# Altium PCB PCB_Awg.PcbDoc (part 1 of 2)
Units mm, origin at the board's own origin, x right, y up, seen from the top; angles counter-clockwise.
Board outline 100 x 100 mm, 2 copper layers (Top Layer, Bottom Layer); 107 components, 76 nets, 298 pads, 59 vias.
Unrouted connection lines stored in the file: 35.
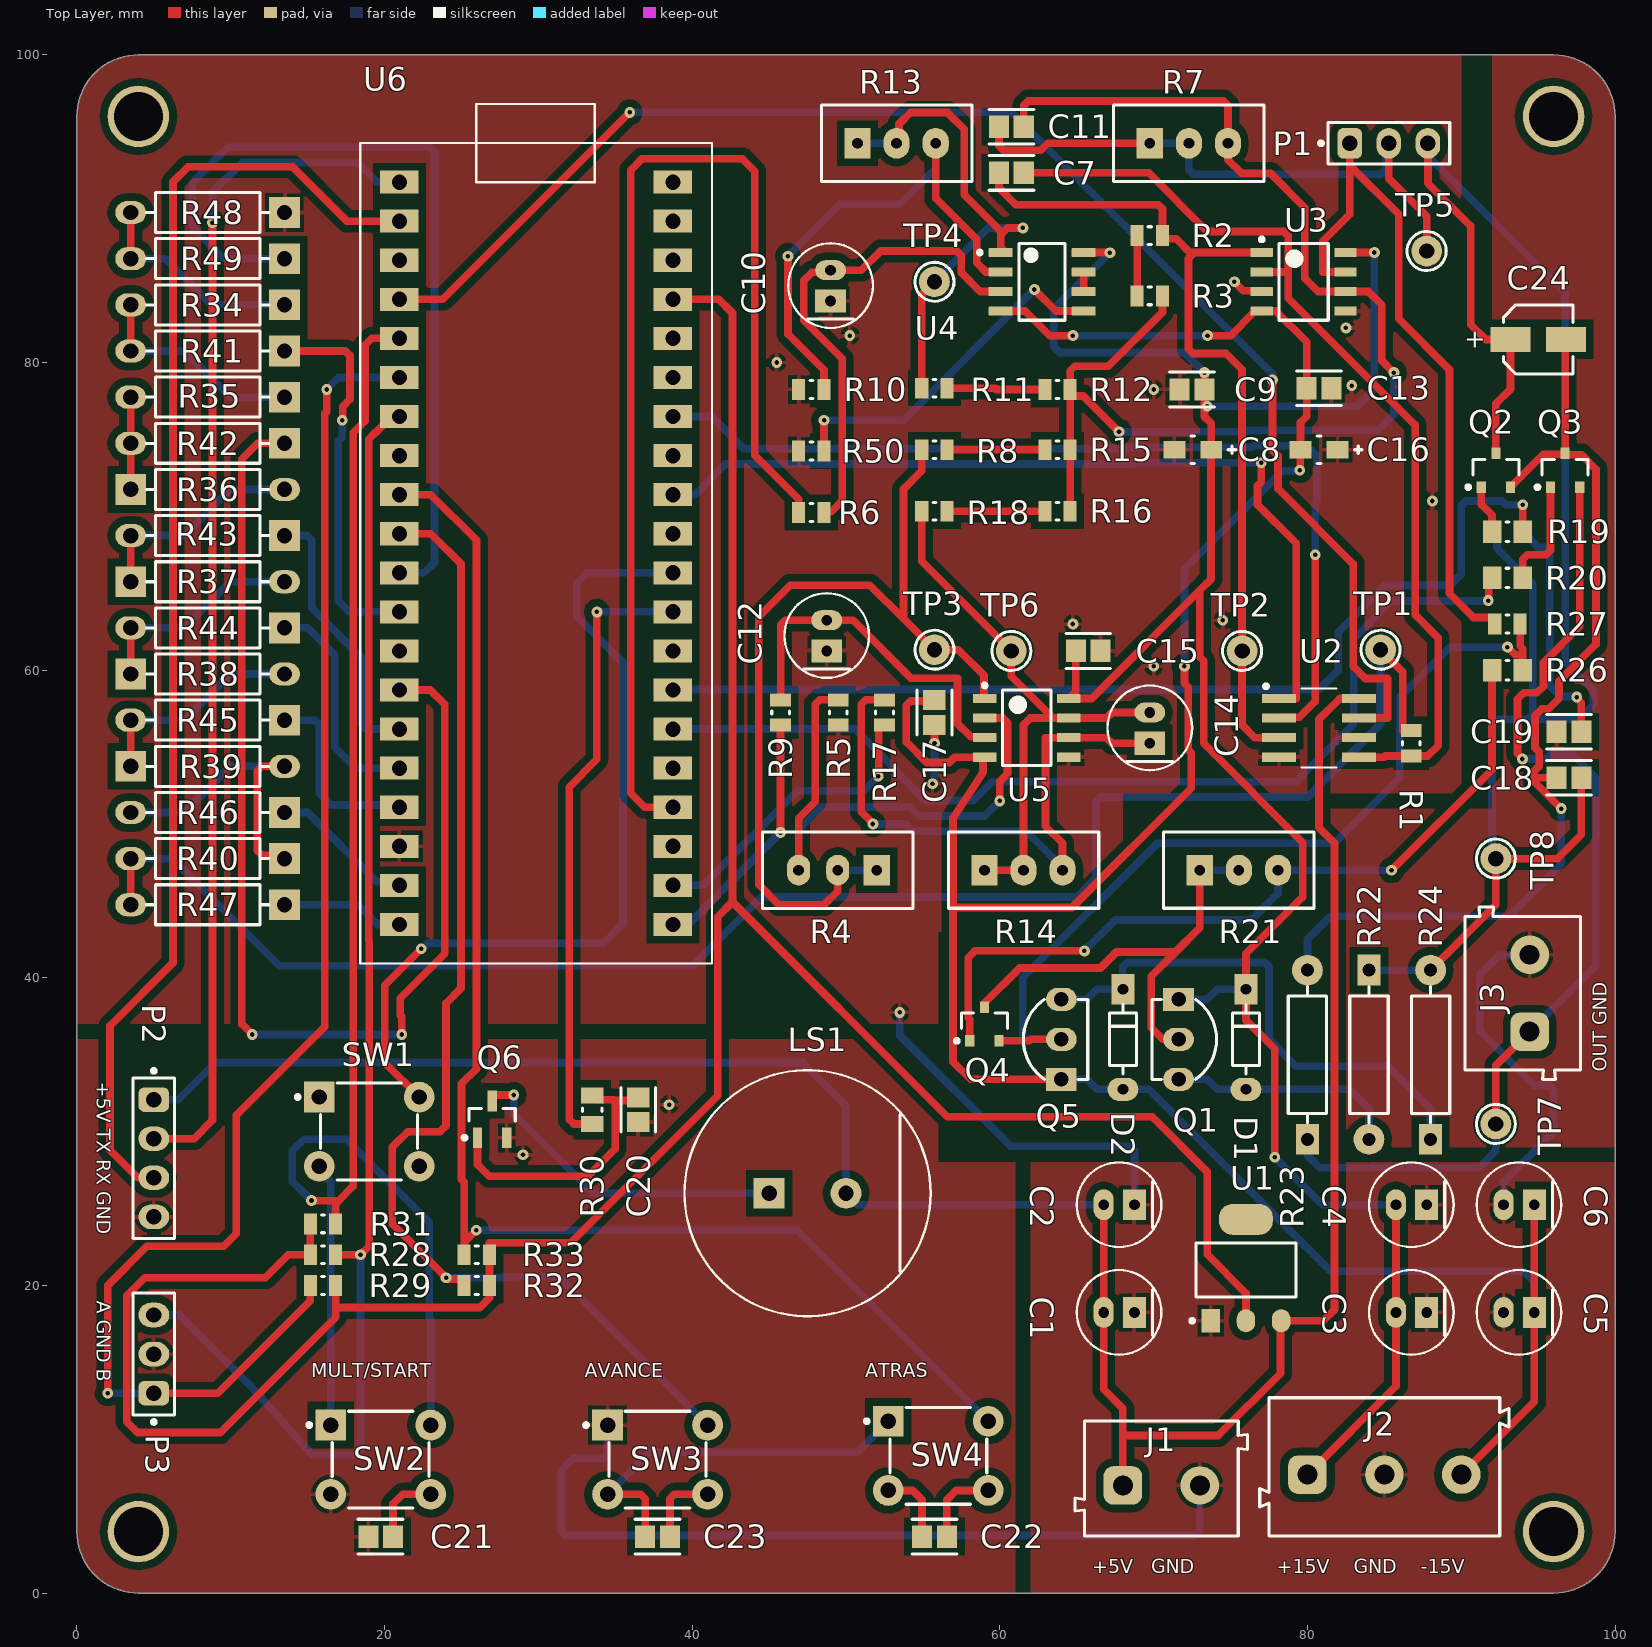
[diagram p0: Top Layer view]
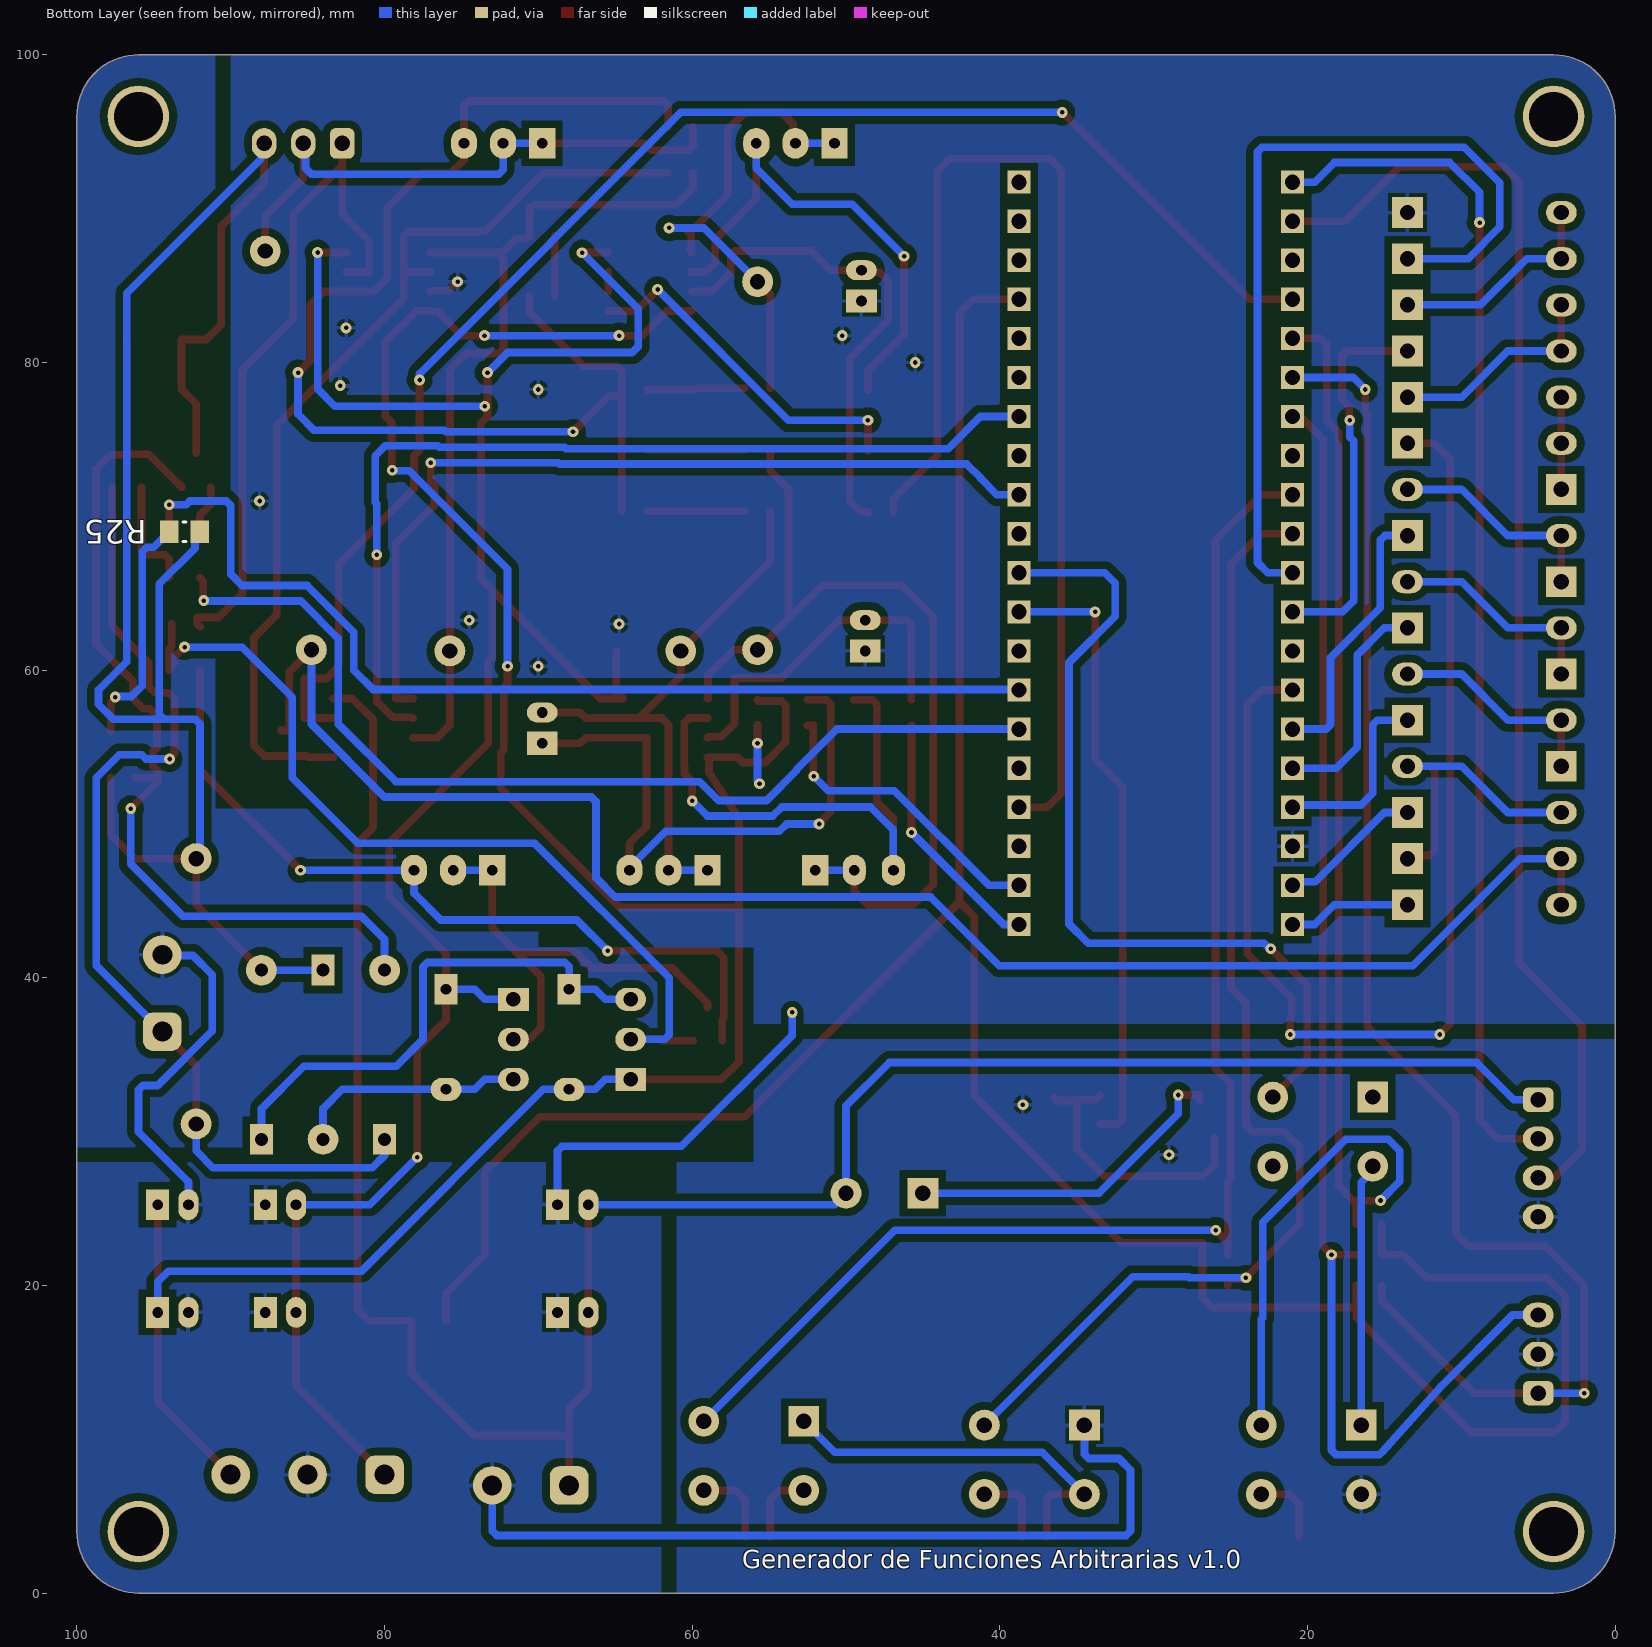
[diagram p1: Bottom Layer view, seen from below]
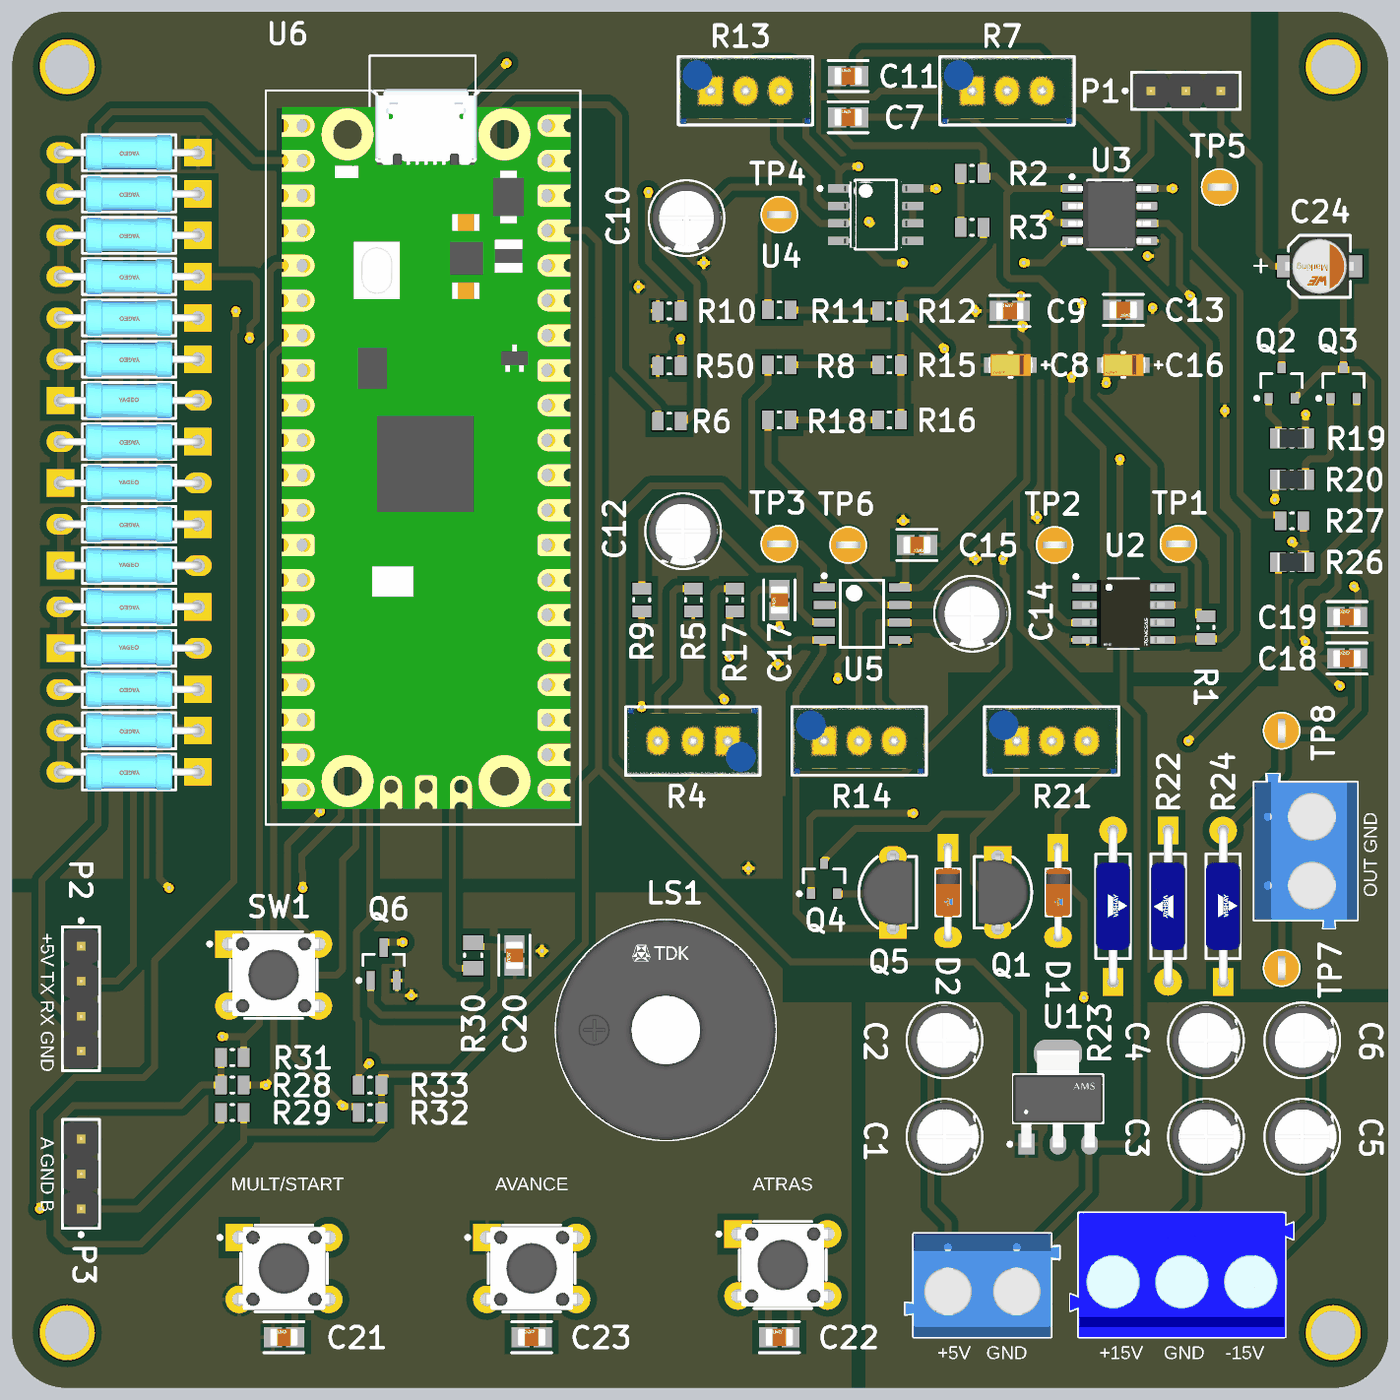
[diagram p2: 3D render of the assembled board from above, using the file's embedded part models]

## Layer stack, top to bottom
Top Solder: solder mask 0.0102, Solder Resist, Dk 3.5
Top Layer: signal copper 0.0356
Dielectric 1: dielectric 0.32, FR-4, Dk 4.8
Bottom Layer: signal copper 0.0356
Bottom Solder: solder mask 0.0102, Solder Resist, Dk 3.5

## Board outline
4,0 cw(c4,4) 0,4 0,96 cw(c4,96) 4,100 96,100 cw(c96,96) 100,96 100,4 cw(c96,4) 96,0

## Design rules (kind name [scope] priority, off if disabled: settings)
Clearance [All] p1: gap=0.5 ignorepadtopadclearanceinfootprint=TRUE
HoleSize [All] p1: absolutevalues=TRUE maxlimit=3.2 minlimit=0.025 maxpercent=80.000 minpercent=20.000
MinimumSolderMaskSliver [All] p1 off: minsoldermaskwidth=0.254
PolygonConnect [All] p1: connectstyle=Relief reliefconductorwidth=0.254 reliefentries=4 polygonreliefangle="90 Angle" airgapwidth=0.254
RoomDefinition Control [InComponentClass('Control')] p1: confinementstyle=ConfineIn formatcopy=TRUE lockcomponents=FALSE outline 16,100 16,36 90,36 90,100
RoomDefinition Salida [InComponentClass('Salida')] p2: confinementstyle=ConfineIn formatcopy=TRUE lockcomponents=FALSE outline 56,28 100,28 100,100 90,100 90,52 68,52 68,42 67,41 56,41
RoomDefinition Perifericos [InComponentClass('Perifericos')] p3: confinementstyle=ConfineIn formatcopy=TRUE lockcomponents=FALSE outline 0,36 0,0 61,0 61,36
RoomDefinition Dac [InComponentClass('Dac')] p4: confinementstyle=ConfineIn formatcopy=TRUE lockcomponents=FALSE outline 0,100 0,36 16,36 16,100
RoomDefinition Alimentacion [InComponentClass('Alimentacion')] p5: confinementstyle=ConfineIn formatcopy=TRUE lockcomponents=FALSE outline 100,29 61,29 61,0 100,0
RoutingLayers RoutingLayers_GND [InNet('GND')] p1: top layer_v5=FALSE bottom layer_v5=FALSE
RoutingLayers [All] p2: top layer_v5=TRUE bottom layer_v5=TRUE
RoutingVias [All] p1: holewidth=0.2 width=0.7 viastyle="Through Hole" minholewidth=0.2 minwidth=0.5 maxholewidth=0.3 maxwidth=1
SilkToSilkClearance [All] p1 off: silktosilkclearance=0.254
SilkToSolderMaskClearance [IsPad] p1 off: minsilkscreentomaskgap=0.1 clearancetoexposedcopper=TRUE
SolderMaskExpansion [All] p1: expansion=0.102 istentingtop=FALSE
UnRoutedNet UnRoutedNet_GND [InNet('GND')] p1: checkbadconnections=TRUE
UnRoutedNet [All] p2: checkbadconnections=TRUE
Width "Schematic Width Constraint" [InNetClass('POWER')] p1: maxlimit=1 minlimit=0.5 preferedwidth=0.5
Width [All] p2: maxlimit=1 minlimit=0.3 preferedwidth=0.5
24 further rules are at their usual default settings.

## Classes and differential pairs
net class POWER: +3.3V +5 +15 -15 GND NetU1_4
component class Dac: R34 R35 R36 R37 R38 R39 R40 R41 R42 R43 R44 R45 R46 R47 R48 R49
component class Salida: C18 C19 C24 D1 D2 J3 Q1 Q2 Q3 Q4 Q5 R19 R20 R21 R22 R23 R24 R25 R26 R27 TP7 TP8
component class Perifericos: C20 C21 C22 C23 LS1 P2 P3 Q6 R28 R29 R30 R31 R32 R33 SW1 SW2 SW3 SW4
component class Control: C7 C8 C9 C10 C11 C12 C13 C14 C15 C16 C17 P1 R1 R2 R3 R4 R5 R6 R7 R8 R9 R10 R11 R12 R13 R14 R15 R16 R17 R18 R50 TP1 TP2 TP3 TP4 TP5 TP6 U2 U3 U4 U5 U6
component class Alimentacion: C1 C2 C3 C4 C5 C6 J1 J2 U1

## Components (designator, comment, footprint, x,y, rotation, side; value= is the part's Value field where it differs from the comment)
C1 "10 uF" FP-RAD-TH-D_5_0_5-L_11_1-MFG 67.75,18.25 r180 top
C2 "10 uF" FP-RAD-TH-D_5_0_5-L_11_1-MFG 67.75,25.25 r180 top
C3 "10 uF" FP-RAD-TH-D_5_0_5-L_11_1-MFG 86.75,18.25 r180 top
C4 "10 uF" FP-RAD-TH-D_5_0_5-L_11_1-MFG 86.75,25.25 r180 top
C5 "10 uF" FP-RAD-TH-D_5_0_5-L_11_1-MFG 93.75,18.25 r180 top
C6 "10 uF" FP-RAD-TH-D_5_0_5-L_11_1-MFG 93.75,25.25 r180 top
C7 "4.7pF/20%" FP-0805-L_2_01_0_2-W_1_25-IPC_B 60.75,92.33 r180 top
C8 "2.2uF/Tantalio" FP-T491A225K010AT-MFG 72.55,74.33 r0 top
C9 "10nF/Ceramico" FP-0805-L_2_01_0_2-W_1_25-IPC_B 72.5,78.25 r180 top
C10 "10uF" FP-RAD-TH-D_5_0_5-L_11_1-MFG 49,85 r90 top
C11 "4.7pF/20%" FP-0805-L_2_01_0_2-W_1_25-IPC_B 60.75,95.33 r180 top
C12 "10uF" FP-RAD-TH-D_5_0_5-L_11_1-MFG 48.75,62.25 r90 top
C13 "10nF/Ceramico" FP-0805-L_2_01_0_2-W_1_25-IPC_B 80.75,78.33 r0 top
C14 "10uF" FP-RAD-TH-D_5_0_5-L_11_1-MFG 69.75,56.25 r90 top
C15 "100nF" FP-0805-L_2_01_0_2-W_1_25-IPC_B 65.75,61.25 r0 top
C16 "2.2uF/Tantalio" FP-T491A225K010AT-MFG 80.75,74.33 r0 top
C17 "100nF" FP-0805-L_2_01_0_2-W_1_25-IPC_B 55.75,57.25 r270 top
C18 "100nF" FP-0805-L_2_01_0_2-W_1_25-IPC_B 97,53 r180 top
C19 "100nF" FP-0805-L_2_01_0_2-W_1_25-IPC_B 97,56 r180 top
C20 "100nF" FP-0805-L_2_01_0_2-W_1_25-IPC_B 36.5,31.425 r270 top
C21 "100nF" FP-0805-L_2_01_0_2-W_1_25-IPC_B 19.75,3.675 r180 top
C22 "100nF" FP-0805-L_2_01_0_2-W_1_25-IPC_B 55.75,3.675 r180 top
C23 "100nF" FP-0805-L_2_01_0_2-W_1_25-IPC_B 37.75,3.675 r180 top
C24 "22uf" WCAP-ASLU_D4H5.5 95,81.5 r180 top
D1 "1N4148TR" FP-6_560-5004_12-4-MFG 76,36 r270 top
D2 "1N4148TR" FP-6_560-5004_12-4-MFG 68,36 r270 top
J1 "691102710002" 691102710002 70.5,7.45 r0 top
J2 "691101710003" 691101710003 85,8.2 r0 top
J3 "Señal_Salida" 691102710002 94,39 r90 top
LS1 "Buzzer 5V" FP-SDC1610M5-01-MFG 47.5,26 r0 top
P1 "J_Etapa_Realm" 61300311121 85.29,94.25 r0 top
P2 "Nextion Display" 61300411121 5,28.27 r270 top
P3 "Encoder" 61300311121 5,15.54 r90 top
Q1 "2N2219" FP-135AR-MFG 72,36 r0 top
Q2 "BC847B" INF-SOT23_L 92.25,73 r90 top
Q3 "BC847B" INF-SOT23_L 96.75,73 r90 top
Q4 "BC847B" INF-SOT23_L 59,37 r90 top
Q5 "2N2907" FP-135AR-MFG 63.62,36 r180 top
Q6 "BC847B" INF-SOT23_M 27,30.8 r90 top
R1 "Jumper_Dac" RESC2013X50X30LL20T20 86.75,55.25 r270 top
R2 "Jumper_Amp" RESC2013X50X30LL20T20 69.75,88.25 r180 top
R3 "10k" RESC2013X50X30LL20T20 69.75,84.33 r0 top
R4 "10k" FP-3296W-MFG#1 49.46,46.995 r90 top
R5 "2.2k" RESC2013X50X30LL20T20 49.5,57.25 r90 top
R6 "1k" RESC2013X50X30LL20T20 47.75,70.25 r0 top
R7 "50k" FP-3296W-MFG#2 72.29,94.255 r270 top
R8 "Jumper_FiltroPost" RESC2013X50X30LL20T20 55.75,74.33 r0 top
R9 "1k" RESC2013X50X30LL20T20 45.75,57.25 r90 top
R10 "2.2k" RESC2013X50X30LL20T20 47.75,78.25 r0 top
R11 "Jumper_Amp" RESC2013X50X30LL20T20 55.75,78.33 r0 top
R12 "10k" RESC2013X50X30LL20T20 63.75,78.25 r0 top
R13 "10k" FP-3296W-MFG#2 53.29,94.255 r270 top
R14 "10k" FP-3296W-MFG#2 61.54,47.005 r270 top
R15 "10k" RESC2013X50X30LL20T20 63.75,74.33 r0 top
R16 "10k" RESC2013X50X30LL20T20 63.75,70.33 r0 top
R17 "2.2k" RESC2013X50X30LL20T20 52.5,57.25 r90 top
R18 "Jumper_FiltroNeg" RESC2013X50X30LL20T20 55.75,70.33 r0 top
R19 "33k" RESC2013X60X35ML10T20 93,69 r0 top
R20 "33k" RESC2013X60X35ML10T20 93,66 r180 top
R21 "10k" FP-3296W-MFG#2 75.54,47.005 r270 top
R22 "0.82" FP-RLR07-MFG 84,35 r270 top
R23 "50" FP-RLR07-MFG 80,35 r90 top
R24 "0.82" FP-RLR07-MFG 88,35 r90 top
R25 "10" RESC2013X60X35ML10T20 93,69 r180 bottom
R26 "1k" RESC2013X60X35ML10T20 93,60 r180 top
R27 "Jumper_AO_Output" RESC2013X50X30LL20T20 93,63 r0 top
R28 "10k" RESC2013X50X30LL20T20 16,22 r180 top
R29 "10k" RESC2013X50X30LL20T20 16,20 r0 top
R30 "5.6k" RESC2013X50X30NL20T20 33.5,31.425 r90 top
R31 "10k" RESC2013X50X30LL20T20 16,24 r180 top
R32 "10k" RESC2013X50X30LL20T20 26,20 r0 top
R33 "10k" RESC2013X50X30LL20T20 26,22 r0 top
R34 "1k2" FP-MFR-25-MFG 8.5,83.75 r180 top value=1.18kΩ
R35 "1k2" FP-MFR-25-MFG 8.5,77.75 r180 top value=1.18kΩ
R36 "1k2" FP-MFR-25-MFG 8.5,71.75 r0 top value=1.18kΩ
R37 "1k2" FP-MFR-25-MFG 8.5,65.75 r0 top value=1.18kΩ
R38 "1k2" FP-MFR-25-MFG 8.5,59.75 r0 top value=1.18kΩ
R39 "1k2" FP-MFR-25-MFG 8.5,53.75 r0 top value=1.18kΩ
R40 "1k2" FP-MFR-25-MFG 8.5,47.75 r180 top value=1.18kΩ
R41 "2k4" FP-MFR-25-MFG 8.5,80.75 r180 top value=1.18kΩ
R42 "2k4" FP-MFR-25-MFG 8.5,74.75 r180 top value=1.18kΩ
R43 "2k4" FP-MFR-25-MFG 8.5,68.75 r180 top value=1.18kΩ
R44 "2k4" FP-MFR-25-MFG 8.5,62.75 r180 top value=1.18kΩ
R45 "2k4" FP-MFR-25-MFG 8.5,56.75 r180 top value=1.18kΩ
R46 "2k4" FP-MFR-25-MFG 8.5,50.75 r180 top value=1.18kΩ
R47 "2k4" FP-MFR-25-MFG 8.5,44.75 r180 top value=1.18kΩ
R48 "2k4" FP-MFR-25-MFG 8.5,89.75 r180 top value=1.18kΩ
R49 "2k4 LSB" FP-MFR-25-MFG 8.5,86.75 r180 top value=1.18kΩ
R50 "10k" RESC2013X50X30LL20T20 47.75,74.25 r0 top
SW1 "RUN" FP-EVQ-PAC07K-MFG 19,30 r0 top
SW2 "AVANCE" FP-EVQ-PAC07K-MFG 19.75,8.675 r0 top
SW3 "ATRAS" FP-EVQ-PAC07K-MFG 37.75,8.675 r0 top
SW4 "MULT/START" FP-EVQ-PAC07K-MFG 56,8.925 r0 top
TP1 "Dac" KSTN-5003 84.75,61.33 r0 top
TP2 "Dac_Amplificado" KSTN-5003 75.75,61.25 r0 top
TP3 "Offset 1" KSTN-5003 55.75,61.33 r0 top locked
TP4 "V_de_desacople" KSTN-5003 55.75,85.25 r0 top
TP5 "Sumador Inversor" KSTN-5003 87.75,87.25 r0 top
TP6 "Offset 2" KSTN-5003 60.75,61.25 r0 top
TP7 "TestPoint_Salida" KSTN-5003 92.25,30.5 r90 top
TP8 "TestPoint_FeedBack" KSTN-5003 92.25,47.75 r270 top
U1 "AMS1117-3.3" FP-AMS1117-IPC_C 76,21 r90 top
U2 "X9C103SIZT1" M8_15_MFG 80.75,56.25 r0 top
U3 "LM6172" D0008A_N 79.75,85.25 r0 top
U4 "LM358DR" FP-D0008A-MFG 62.75,85.25 r0 top
U5 "LM358" ONSC-SOIC-8-751-07_V 61.75,56.25 r0 top
U6 "RASPBERRY_PI_PICO" RASPBERRY_PI_PICO 29.86,68.87 r0 top

## Footprints (in the part's own frame and the unit in brackets; to place one, negate y for a bottom-side part, rotate by r counter-clockwise, add the part's x,y. Pads: shape width x height; smd on the part's side, far side on the other; paste and mask are expansions set on the pad)
61300311121 [mm] "Pin Header, pitch 2.54 mm, THT, Vertical, single row, 3p"
  rrect50% 1.6x2 hole 1: 1(-2.54,0)
  oval 1.6x2 hole 1: 2(0,0) 3(2.54,0)
  silkscreen extent -4.53,-1.35 3.96,1.34, body extent -3.81,-1.27 3.81,1.27, height 8.57
61300411121 [mm] "Pin Header, pitch 2.54 mm, THT, Vertical, single row, 4p"
  rrect50% 1.6x2 hole 1: 1(-3.81,0)
  oval 1.6x2 hole 1: 2(-1.27,0) 3(1.27,0) 4(3.81,0)
  silkscreen extent -5.8,-1.35 5.23,1.35, body extent -5.08,-1.27 5.08,1.27, height 8.57
691101710003 [mm] "5,00mm - modular - blue - Horizontal entry with pressure clamp - 12,6mm height - 03p"
  rrect50% 2.5x2.5 hole 1.3: 1(-5,-0.5)
  round 2.5 hole 1.3: 2(0,-0.5) 3(5,-0.5)
  silkscreen extent -8.1,-4.5 8.1,4.5, body extent -8.1,-4.5 8.1,4.5, height 12.65
691102710002 [mm] "5,00mm - modular - blue - Horizontal entry with pressure clamp - 9,9 mm height - 02p"
  rrect50% 2.5x2.5 hole 1.3: 1(-2.5,-0.45)
  round 2.5 hole 1.3: 2(2.5,-0.45)
  silkscreen extent -5.6,-3.75 5.6,3.75, body extent -5.6,-3.75 5.6,3.75, height 9.96
D0008A_N [mm] "SOIC, 8-Leads, Body 5x4mm, Pitch 1.27mm, IPC Medium Density"
  rrect17% 1.45x0.6 smd: 1(-2.725,1.905) 2(-2.725,0.635) 3(-2.725,-0.635) 4(-2.725,-1.905) 5(2.725,-1.905) 6(2.725,-0.635) 7(2.725,0.635) 8(2.725,1.905)
  silkscreen extent -2.85,-2.5 1.6,2.88, body extent -3,-2.45 3,2.45, height 1.63
FP-6_560-5004_12-4-MFG [mm]
  rect 2x1.5 hole 0.7 paste-1000 mask+0: 1(-3.25,0)
  oval 1.5x2 hole 0.7 paste-1000 mask+0: 2(3.25,0)
  silkscreen extent -2.25,-0.87 2.25,0.88, body extent -3.95,-0.97 3.95,0.97, height 0.25
FP-135AR-MFG [mm]
  rect 2x1.5 hole 0.95 paste-1000 mask+0: 1(-0.38,2.6)
  oval 2x1.5 hole 0.95 paste-1000 mask+0: 2(-0.38,0) 3(-0.38,-2.6)
  silkscreen extent -2.09,-2.6 2.09,2.6, body extent -2.19,-3.42 2.19,3.42, height 0.25
FP-0805-L_2_01_0_2-W_1_25-IPC_B [mm]
  rect 1.305x1.456 smd paste+0 mask+0: 1(-0.806,0) 2(0.806,0)
  silkscreen extent -1.46,-1.13 1.46,1.13, body extent -1.71,-0.98 1.71,0.98, height 0.25
FP-3296W-MFG#1 [mm]
  rect 2x1.7 hole 0.7 paste-1000 mask+0: 1(0.005,-2.54)
  oval 2x1.5 hole 0.7 paste-1000 mask+0: 2(0.005,0) 3(0.005,2.54)
  silkscreen extent -2.48,-4.89 2.48,4.89, body extent -2.58,-4.99 2.58,4.99, height 0.25
FP-3296W-MFG#2 [mm]
  rect 2x1.7 hole 0.7 paste-1000 mask+0: 1(0.005,-2.54)
  oval 2x1.7 hole 0.7 paste-1000 mask+0: 2(0.005,0) 3(0.005,2.54)
  silkscreen extent -2.48,-4.89 2.48,4.89, body extent -2.58,-4.99 2.58,4.99, height 0.25
FP-AMS1117-IPC_C [mm]
  rect 1.5x1.2 smd paste+0 mask+0: 1(-3.295,2.29)
  rrect100% 1.5x1.2 smd paste+0 mask+0: 2(-3.295,0) 3(-3.295,-2.29)
  rrect87% 2x3.5 smd paste+0 mask+0: 4(3.295,0)
  silkscreen extent -3.42,-3.25 1.75,3.62, body extent -3.9,-3.35 3.9,3.35, height 0.25
FP-D0008A-MFG [mm]
  rrect17% 1.55x0.6 smd paste+0 mask+0: 1(-2.7,1.905) 2(-2.7,0.635) 3(-2.7,-0.635) 4(-2.7,-1.905) 5(2.7,-1.905) 6(2.7,-0.635) 7(2.7,0.635) 8(2.7,1.905)
  silkscreen extent -4.17,-2.5 1.5,2.5, body extent -3.57,-2.75 3.57,2.75, height 0.25
FP-EVQ-PAC07K-MFG [mm]
  rect 2x2 hole 1 paste-1000 mask+0: A(-3.25,2.25)
  round 2 hole 1 paste-1000 mask+0: A'(-3.25,-2.25) B(3.25,2.25) B'(3.25,-2.25)
  silkscreen extent -4.77,-3.15 3.15,3.15, body extent -4.13,-3.25 4.13,3.25, height 0.25
FP-MFR-25-MFG [mm]
  rect 2x2 hole 1 paste-1000 mask+0: 1(-5,0)
  oval 2x1.5 hole 1 paste-1000 mask+0: 2(5,0)
  silkscreen extent -3.97,-1.3 3.98,1.3, body extent -5.27,-1.3 5.28,1.3, height 2.6
FP-RAD-TH-D_5_0_5-L_11_1-MFG [mm]
  rect 1.5x2 hole 0.7 paste-1000 mask+0: 1(-1,0)
  oval 1.3x2 hole 0.7 paste-1000 mask+0: 2(1,0)
  silkscreen extent -2.75,-2.75 2.75,2.75, body extent -2.85,-2.85 2.85,2.85, height 0.25
FP-RLR07-MFG [mm]
  rect 2x1.5 hole 0.85 paste-1000 mask+0: 1(-5.5,0)
  round 2 hole 0.85 paste-1000 mask+0: 2(5.5,0)
  silkscreen extent -4.43,-1.25 4.42,1.25, body extent -6.27,-1.35 6.27,1.35, height 0.25
FP-SDC1610M5-01-MFG [mm]
  rect 2x2 hole 1 paste-1000 mask+0: 1(-2.5,0)
  round 2 hole 1 paste-1000 mask+0: 2(2.5,0)
  silkscreen extent -8,-8 8,8, body extent -8.1,-8.1 8.1,8.1, height 0.25
FP-T491A225K010AT-MFG [mm]
  rect 1.42x1.13 smd paste+0 mask+0: 1(-1.2,0) 2(1.2,0)
  silkscreen extent -0.12,-0.9 2.8,0.9, body extent -2.03,-1.02 2.03,1.02, height 0.25
INF-SOT23_L [mm] "SOT23, 3-Leads, Body 2.9x1.3 mm, Pitch 0.95 mm, IPC High Density"
  rect 0.75x0.6 smd: 1(-1.1,0.95) 2(-1.1,-0.95) 3(1.1,0)
  silkscreen extent -1.22,-1.5 0.7,1.92, body extent -0.7,-1.5 0.7,1.5, height 1.1
INF-SOT23_M [mm] "SOT23, 3-Leads, Body 2.9x1.3 mm, Pitch 0.95 mm, IPC Low Density"
  rect 1.35x0.6 smd: 1(-1.2,0.95) 2(-1.2,-0.95) 3(1.2,0)
  silkscreen extent -1.32,-1.5 0.7,1.92, body extent -0.7,-1.5 0.7,1.5, height 1.1
KSTN-5003 [mm] "Test Point, Through Hole, Dia 2.54mm"
  round 2 hole 1: 1(0,0)
  silkscreen extent -1.27,-1.27 1.27,1.27, body extent -1.27,-1.27 1.27,1.27, height 4.57
M8_15_MFG [mm] "Recommended Land Pattern"
  rect 2.2x0.6 smd: 1(-2.6,1.905) 2(-2.6,0.635) 3(-2.6,-0.635) 4(-2.6,-1.905) 5(2.6,-1.905) 6(2.6,-0.635) 7(2.6,0.635) 8(2.6,1.905)
  silkscreen extent -3.57,-2.56 1.13,2.83, body extent -3.8,-2.75 3.8,2.75, height 0.25
ONSC-SOIC-8-751-07_V [mm] "SOIC, 8-Leads, Body 4.9x3.9mm, Pitch 1.27mm"
  rect 1.52x0.6 smd: 1(-2.74,1.905) 2(-2.74,0.635) 3(-2.74,-0.635) 4(-2.74,-1.905) 5(2.74,-1.905) 6(2.74,-0.635) 7(2.74,0.635) 8(2.74,1.905)
  silkscreen extent -2.86,-2.45 1.58,2.88, body extent -1.95,-2.45 1.95,2.45, height 1.75
RASPBERRY_PI_PICO [mm]
  rect 2.5x1.5 / inner round 1.508 / far side rect 1.508x1.508 hole 1: 3V3(8.89,12.7) 3V3_EN(8.89,15.24) ADC_VREF(8.89,10.16) AGND(8.89,5.08) GND(8.89,17.78) GND2(8.89,-7.62) GND3(8.89,-20.32) GND4(-8.89,17.78) GND5(-8.89,5.08) GND6(-8.89,-7.62) GND7(-8.89,-20.32) GP0(-8.89,22.86) GP1(-8.89,20.32) GP2(-8.89,15.24) GP3(-8.89,12.7) GP4(-8.89,10.16) GP5(-8.89,7.62) GP6(-8.89,2.54) GP7(-8.89,0) GP8(-8.89,-2.54) GP9(-8.89,-5.08) GP10(-8.89,-10.16) GP11(-8.89,-12.7) GP12(-8.89,-15.24) GP13(-8.89,-17.78) GP14(-8.89,-22.86) GP15(-8.89,-25.4) GP16(8.89,-25.4) GP17(8.89,-22.86) GP18(8.89,-17.78) GP19(8.89,-15.24) GP20(8.89,-12.7) GP21(8.89,-10.16) GP22(8.89,-5.08) GP26_A0(8.89,0) GP27_A1(8.89,2.54) GP28_A2(8.89,7.62) RUN(8.89,-2.54) VBUS(8.89,22.86) VSYS(8.89,20.32)
  silkscreen extent -11.43,-27.94 11.43,27.94, body extent -10.29,-26.78 10.71,25.51, height 3.73
RESC2013X50X30LL20T20 [mm] "Chip Resistor, 2-Leads, Body 2.00x1.25mm, IPC High Density"
  rect 0.85x1.35 smd: 1(-0.825,0) 2(0.825,0)
  silkscreen extent -0.1,-0.57 0.1,0.57, body extent -1.1,-0.72 1.1,0.72, height 0.5
RESC2013X50X30NL20T20 [mm] "Chip Resistor, 2-Leads, Body 2.00x1.25mm, IPC Medium Density"
  rect 1.05x1.45 smd: 1(-0.925,0) 2(0.925,0)
  silkscreen extent -0.1,-0.62 0.1,0.62, body extent -1.1,-0.72 1.1,0.72, height 0.5
RESC2013X60X35ML10T20 [mm] "Chip Resistor, 2-Leads, Body 2.1x1.35mm, IPC Low Density"
  rect 1.2x1.45 smd: 1(-1,0) 2(1,0)
  silkscreen extent -0.1,-0.63 0.1,0.63, body extent -1.05,-0.68 1.05,0.67, height 0.6
WCAP-ASLU_D4H5.5 [mm] "Aluminum Electrolytic Capacitors, body diameter 4mm"
  rect 2.6x1.6 smd: 1(1.8,0) 2(-1.8,0)
  silkscreen extent -2.25,-2.25 2.25,2.25, body extent -2.5,-2.15 2.5,2.15, height 5.5

## Part data
C1 C2 C3 C4 C5 C6: library part CMP-05427-001517-1, "Aluminum Electrolytic Capacitors (Radial Lead Type) 10uF ±20% 63V", Capacitance=10uF, Case/Package=Radial, Dielectric Material=Aluminium, Leakage Current=3uA, Max Operating Temperature=85°C, Min Operating Temperature=-40°C, Package Quantity=200, Ripple Current=70mA, Tolerance=20%, Voltage=63V, Construction=RADIAL, Diameter=5mm, Dissipation Factor=0.11%, Height=11mm, Height - Seated (Max)=0.472inch, Lead Diameter=0.5mm, Lead Free="Lead Free", Lead Pitch=2mm, Lead/Base Style=Straight, Length=11mm, Life (Hours)=2000Hour, Mount="Through Hole", Packaging=Bulk, Radiation Hardening=No, REACH SVHC="No SVHC", RoHS Compliant=Yes, Series=M, Termination=Radial, Voltage Rating=63V, Voltage Rating (DC)=63V, Width=5mm
C7 C9 C11 C13: library part CMP-2007-04174-2, "General Purpose Ceramic Capacitor, 0805, 100nF, 10%, X7R, 15%, 100V", Capacitance=100nF, Case Code (Imperial)=0805, Case Code (Metric)=2012, Dielectric=X7R, Dielectric Material=Ceramic, Max Operating Temperature=125°C, Min Operating Temperature=-55°C, Package Quantity=2000, Tolerance=10%, Voltage=100V, Case/Package=0805, Construction=Flat, Contact Plating=Tin, Depth=1.25mm, Height=1.4mm, Lead Free="Lead Free", Length=2.01mm, Mount="Surface Mount", Number of Pins=2, Packaging="Tape and Reel", Radiation Hardening=No, REACH SVHC="No SVHC", RoHS Compliant=Yes, Series=-, Termination=SMD/SMT, Thickness=0.055inch, Voltage Rating=100V, Voltage Rating (DC)=100V, Width=0.049inch
C8 C16: library part CMP-03017-000061-1, "CAP TANT 2.2UF 10% 10V 1206", Capacitance=2.2uF, Case Code (Imperial)=1206, Case Code (Metric)=3216, Dielectric Material=Tantalum, ESR (Equivalent Series Resistance)=8R, Leakage Current=500nA, Max Operating Temperature=125°C, Min Operating Temperature=-55°C, Package Quantity=1, Ripple Current=97mA, Tolerance=10%, Voltage=10V, Case/Package=1206, Depth=1.6mm, Dissipation Factor=6%, Features="General Purpose", Height=1.6mm, Height - Seated (Max)=0.071inch, Lead Free="Lead Free", Length=3.2mm, Life (Hours)=2000Hour, Mount="Surface Mount", Number of Pins=2, Packaging="Tape and Reel", Polarity=Polar, Radiation Hardening=No, REACH SVHC="No SVHC", RoHS Compliant=Yes, Termination=SMD/SMT, Voltage Rating=10V, Voltage Rating (DC)=10V, Width=1.6mm
C10 C12 C14: library part CMP-05427-001517-1, "Aluminum Electrolytic Capacitors (Radial Lead Type) 10uF ±20% 63V", Case/Package=Radial, Dielectric Material=Aluminium, Leakage Current=3uA, Max Operating Temperature=85°C, Min Operating Temperature=-40°C, Package Quantity=200, Ripple Current=70mA, Tolerance=20%, Voltage=63V, Capacitance=10uF, Construction=RADIAL, Diameter=5mm, Dissipation Factor=0.11%, Height=11mm, Height - Seated (Max)=0.472inch, Lead Diameter=0.5mm, Lead Free="Lead Free", Lead Pitch=2mm, Lead/Base Style=Straight, Length=11mm, Life (Hours)=2000Hour, Mount="Through Hole", Packaging=Bulk, Radiation Hardening=No, REACH SVHC="No SVHC", RoHS Compliant=Yes, Series=M, Termination=Radial, Voltage Rating=63V, Voltage Rating (DC)=63V, Width=5mm
C15 C17 C18 C19 C20 C21 C22 C23: library part CMP-2007-04174-2, "General Purpose Ceramic Capacitor, 0805, 100nF, 10%, X7R, 15%, 100V", Case Code (Imperial)=0805, Case Code (Metric)=2012, Dielectric=X7R, Dielectric Material=Ceramic, Max Operating Temperature=125°C, Min Operating Temperature=-55°C, Package Quantity=2000, Tolerance=10%, Voltage=100V, Capacitance=100nF, Case/Package=0805, Construction=Flat, Contact Plating=Tin, Depth=1.25mm, Height=1.4mm, Lead Free="Lead Free", Length=2.01mm, Mount="Surface Mount", Number of Pins=2, Packaging="Tape and Reel", Radiation Hardening=No, REACH SVHC="No SVHC", RoHS Compliant=Yes, Series=-, Termination=SMD/SMT, Thickness=0.055inch, Voltage Rating=100V, Voltage Rating (DC)=100V, Width=0.049inch
C24: library part CMP-03913-53914652-1, "865090640004 WCAP-ASLU Aluminum Electrolytic Capacitors", Capacitance=470nF, Case/Package=Radial, Insulation Resistance=16.6667MΩ, Leakage Current=400nA, Max Operating Temperature=85°C, Min Operating Temperature=-40°C, Ripple Current=4mA, Tolerance=20%, Voltage Rating=50V, Diameter=4mm, Height=5.5mm, Height - Seated (Max)=5.5118mm, Length=5.5mm, Life (Hours)=1000hours, Material=Aluminium, Mount="Surface Mount", NexarPartId=53914652, Packaging="Tape & Reel (TR)", Polarity=Polar, REACH SVHC=Unknown, Ripple Current (AC)=4mA, RoHS=Compliant, Voltage Rating (DC)=50V, Width=4.3mm
D1 D2: library part CMP-02540-000029-2, "DIODE GEN PURP 75V 300MA DO35", Current Rating=150A, Forward Current=300mA, Forward Voltage=1V, Max Operating Temperature=175°C, Max Repetitive Reverse Voltage (Vrrm)=100V, Min Operating Temperature=-65°C, Peak Non-Repetitive Surge Current=2A, Power Dissipation=440mW, Element Configuration=Single, Lead Free="Lead Free", Mount="Through Hole", Number of Pins=2, Packaging="Tape and Reel", Reverse Recovery Time=8ns
J1 J3: library part CMP-1502-03258-2, Color=Blue, Current=15A, Max Operating Temperature=105°C, Min Operating Temperature=-40°C, Voltage=300V, Contact Material=Brass, Contact Plating=Tin, Current Rating=15A, Height=13.4mm, Housing Material=Nylon, Lead Pitch=5mm, Length=7.5mm, Mount="Through Hole", NexarPartId=8917706, Number of Contacts=2, Number of Levels=1, Number of Pins=2, Number of Positions Per Level=2, Packaging=Box, Pitch=5.0038mm, Plating=Steel, REACH SVHC=Unknown, RoHS=Compliant, Stripping Length=-6mm, Termination=Screw, Voltage Rating=300V, Width=11.2mm, Wire Gauge (Max)=22AWG, Wire Gauge (Min)=14AWG, Wire/Cable Gauge=22AWG
J2: library part CMP-1502-03257-2, Color=Blue, Current=16A, Max Operating Temperature=105°C, Min Operating Temperature=-40°C, Voltage=250V, Contact Material=Brass, Contact Plating=Tin, Current Rating=16A, Height=16.4mm, Housing Material=Nylon, Lead Pitch=5mm, Length=9mm, Mount="Through Hole", NexarPartId=8917705, Number of Contacts=3, Number of Levels=1, Number of Pins=3, Number of Positions Per Level=3, Packaging=Box, Pitch=5.0038mm, Plating=Steel, REACH SVHC=Unknown, RoHS=Compliant, Stripping Length=-7mm, Termination=Screw, Voltage Rating=250V, Width=16.2mm, Wire Gauge (Max)=26AWG, Wire Gauge (Min)=14AWG, Wire/Cable Gauge=26AWG
LS1: library part CMP-08413-000008-1, "AUDIO MAGNETIC INDICATOR 4-8V TH", Frequency=2.4kHz, Max Operating Temperature=70°C, Max Supply Current=30mA, Min Operating Temperature=-10°C, Nominal Supply Voltage (DC)=5V, Diameter=16mm, Height=10mm, Input Type=DC, Lead Free="Lead Free", Mount="Through Hole", Number of Pins=2, Number of Terminals/Pins=2, Operating Supply Current=30mA, Packaging=Tray, Sensing Method=Magnetic, Series=SDC, Termination="PC Pins", Voltage Rating=5V
P1 P3: library part CMP-1502-01062-3, Color=Black, Contact Resistance=20mΩ, Current Rating=3A, Max Operating Temperature=105°C, Min Operating Temperature=-40°C, Operating Supply Voltage=250V, Connector Type="Male Pin", Contact Material=Copper, Contact Mating Length=5.9944mm, Contact Plating=Gold, Gender=Male, Height=8.94mm, Lead Free="Lead Free", Lead Pitch=2.54mm, Mount="Through Hole", NexarPartId=32855521, Number of Contacts=3, Number of Pins=3, Number of Positions=3, Number of Rows=1, Orientation=Vertical, Packaging=Bulk, Pitch=2.54mm, REACH SVHC=Unknown, RoHS=Compliant, Termination=Solder, Voltage Rating=250V
P2: library part CMP-1502-01064-3, Color=Black, Contact Resistance=20mΩ, Current Rating=3A, Max Operating Temperature=105°C, Min Operating Temperature=-40°C, Operating Supply Voltage=250V, Connector Type="Male Pin", Contact Material=Copper, Contact Mating Length=5.9944mm, Contact Plating=Gold, Gender=Male, Height=8.89mm, Lead Free="Lead Free", Lead Pitch=2.54mm, Mount="Through Hole", NexarPartId=32855522, Number of Contacts=4, Number of Pins=4, Number of Positions=4, Number of Rows=1, Orientation=Vertical, Packaging=Bulk, Pitch=2.54mm, REACH SVHC=Unknown, RoHS=Compliant, Termination=Solder, Voltage Rating=250V
Q1: library part CMP-00278-84324566-1, "BC548CTA Small Signal Bipolar Transistor, 0.1A I(C), 30V V(BR)CEO, 1-Element, NPN, Silicon, TO-92", Case/Package=TO-92, Collector Base Voltage (VCBO)=30V, Collector Emitter Saturation Voltage=250mV, Current Rating=100mA, Emitter Base Voltage (VEBO)=5V, Frequency=300MHz, Manufacturer Lifecycle Status=ACTIVE, Max Junction Temperature (Tj)=150°C, Max Power Dissipation=500mW, Min Operating Temperature=-65°C, Collector Emitter Breakdown Voltage=30V, Collector Emitter Voltage (VCEO)=30V, Contact Plating=Tin, Element Configuration=Single, Gain Bandwidth Product=300MHz, Height=4.58mm, hFE Min=110, Lead Free="Lead Free", Length=4.58mm, Lifecycle Status=Production, Max Breakdown Voltage=30V, Max Collector Current=100mA, Max Frequency=300MHz, Max Operating Temperature=150°C, Mount="Through Hole", NexarPartId=84324566, Number of Elements=1, Number of Pins=3, Polarity=NPN, Power Dissipation=500mW, Radiation Hardening=No, REACH SVHC="No SVHC", RoHS=Compliant, Schedule B="8541210080, 8541210080", Transition Frequency=300MHz, Voltage Rating (DC)=30V, Weight=240mg, Width=3.86mm
Q2 Q3 Q4 Q6: library part CMP-1177-00042-1, "NPN Silicon AF Transistor, 45 V VCEO, 100 mA IC, SOT23, Reel, Green", Manufacturer=Infineon, ComponentLink1Description="Manufacturer URL", ComponentLink1URL=http://www.infineon.com/, ComponentLink2Description=Datasheet, ComponentLink2URL=http://www.infineon.com/dgdl/bc847series_bc848series_bc849series_bc850series.pdf?folderId=db3a304314dca389011541d30fa21656&fileId=db3a304314dca389011541d4630a1657, ComponentLink3Description="Package Specification", ComponentLink3URL=http://www.infineon.com/dgdl/SOT23-Package_Overview.pdf?folderId=db3a30431936bc4b0119532290053c66&fileId=db3a30431936bc4b0119533468123c85, fT (typ)="250Â MHz", Green=TRUE, IBM (max)="200Â mA", IC (max)="100Â mA", ICBO (max)="15Â nA", ICM (max)="200Â mA", Mounting Technology="Surface Mount", PackageDescription="3-Pin Small Outline Transistor Package, 1.3 x 2.9 mm Body, 0.95 mm Pitch", PackageReference=SOT23, PackageVersion=Apr-08, Packing=Reel, PartNumber=BC847B, Polarity=NPN, Ptot (max)="330Â mW", VCBO (max)="50Â V", VCEO (max)="45Â V", VEBO (max)="6Â V"
Q5: library part CMP-00278-84408945-1, "BC557BTF Small Signal Bipolar Transistor, 0.1A I(C), 45V V(BR)CEO, 1-Element, PNP, Silicon, TO-92", Case/Package=TO-92, Collector Base Voltage (VCBO)=-50V, Collector Emitter Breakdown Voltage=45V, Collector Emitter Saturation Voltage=-250mV, Current Rating=-100mA, Emitter Base Voltage (VEBO)=-5V, Frequency=150MHz, Manufacturer Lifecycle Status=ACTIVE, Max Collector Current=100mA, Max Frequency=10MHz, Max Operating Temperature=150°C, Max Power Dissipation=500mW, Min Operating Temperature=-65°C, Voltage Rating (DC)=-45V, Collector Emitter Voltage (VCEO)=45V, Contact Plating=Tin, Element Configuration=Single, Gain Bandwidth Product=150MHz, Height=5.33mm, hFE Min=110, Lead Free="Lead Free", Length=5.2mm, Lifecycle Status=Production, Max Breakdown Voltage=45V, Mount="Through Hole", NexarPartId=84408945, Number of Elements=1, Number of Pins=3, Polarity=PNP, Power Dissipation=500mW, REACH SVHC="No SVHC", RoHS=Compliant, Schedule B="8541210080, 8541210080", Transition Frequency=150MHz, Weight=240mg, Width=4.19mm
R1 R2 R3 R5 R6 R8 R9 R10 R11 R12 R15 R16 R17 R18 R27 R28 R29 R30 R31 R32 R33 R50: library part CMP-2001-04896-1, Manufacturer="Vishay Dale", Part Number=CRCW08050000Z0EA
R4 R7 R13 R14 R21: library part CMP-07234-000046-1, "TRIMMER 500 OHM 0.5W PC PIN TOP", Color=Blue, Max Operating Temperature=125°C, Max Power Dissipation=500mW, Min Operating Temperature=-55°C, Package Quantity=50, Resistance=500R, Resistance Tolerance=10%, Resistor Type=Cermet, Temperature Coefficient=100ppm/°C, Contact Plating=Tin, Depth=4.83mm, Height=0.395inch, Lead Free="Lead Free", Length=9.53mm, Military Standard=Not, Mount="Through Hole", Number of Turns=25, Packaging=Rail/Tube, Power Rating=500mW, Radiation Hardening=No, REACH SVHC="No SVHC", RoHS Compliant=Yes, Series=3296, Taper=Linear, Technology=CERMET, Termination=Pin, Tolerance=10%, Weight=0.03oz, Width=9.53mm
R19 R20 R25 R26: library part CMP-2100-03671-1, "Chip Resistor, 1 KOhm, +/- 1%, 125 mW, -55 to 155 degC, 0805 (2012 Metric), RoHS, Tape and Reel", Case Code (Imperial)=0805, Case Code (Metric)=2012, Manufacturer=Yageo, Max Operating Temperature=155degC, Max Power Dissipation=125mW, Min Operating Temperature=-55degC, Package Description="2-Pin Surface Mounted Device, Body 2 x 1.25 mm", Package Quantity=1, Resistance=1KOhm, Temperature Coefficient=100ppm/degreesC, Tolerance=1%, Voltage Rating=150V, Case/Package=0805, Composition=ThickFilm, Datasheet URL=http://www.yageo.com/NewPortal/yageodocoutput?fileName=/pdf/R-Chip/PYu-RC_Group_51_RoHS_L_5.pdf, Datasheet Version="Rev. 5, 10/2016", Depth=1.25mm, Height=0.024inch, Lead Free=LeadFree, Length=0.079inch, Manufacturer URL=http://www.yageo.com/, Military Standard=Not, Number of Pins=2, Number of Terminations=2, Package Reference=0805, Packaging=TapeandReel, Power Rating=125mW, REACH SVHC=Unknown, RoHSCompliant=true, Termination=SMD/SMT, Voltage Rating (DC)=150V, Width=0.049inch
R22 R23 R24: library part CMP-00030-39447724-1, "RLR07C1001FSB14 Fixed Resistor, Metal Film, 0.25W, 1000ohm, 250V, 1% +/-Tol, 100ppm/Cel, Through Hole Mount", Case/Package=Conformal, Max Operating Temperature=150°C, Max Power Dissipation=250mW, Min Operating Temperature=-65°C, Resistance=1kΩ, Temperature Coefficient=100ppm/°C, Tolerance=1%, Voltage Rating=250V, Composition="Metal Film", Contact Plating="Lead, Tin", Diameter=2.29mm, Failure Rate=0.001%, Features="Military, Moisture Resistant, Weldable", Lead Diameter=640µm, Lead Free="Contains Lead", Lead Length=38.1mm, Length=7.62mm, Military Standard=MIL-PRF-39017, NexarPartId=39447724, Number of Pins=14, Number of Terminations=2, Packaging=Bulk, Power Rating=250mW, Radiation Hardening=No, REACH SVHC=Unknown, RoHS=Non-Compliant, Schedule B="8533210090, 8533210090", Termination=Axial, Voltage Rating (DC)=250V, Width=2.29mm, Wire/Cable Diameter=50.8µm
R34 R35 R36 R37 R38 R39 R40 R41 R42 R43 R44 R45 R46 R47 R48 R49: library part CMP-03413-000001-1, "RES 1.18K OHM 1/4W 1% AXIAL", Manufacturer=Yageo, Manufacturer Part Number=MFR-25FBF52-1K18, Package=MFR-25, Power Rating=0.25W, Resistance=1.18kΩ, Temperature="-55°C to +155°C", Temperature Coefficient=100ppm/°C, Temperature Range High=+155°C, Temperature Range Low=-55°C, Tolerance=1%, Voltage Rating=250V, Automotive=No, Category=Res, ComponentLink2Description=Datasheet, ComponentLink2URL=https://www.yageo.com/upload/media/product/products/datasheet/lr/Yageo_LR_MFR_1.pdf, Composition="Metal Film", Device Class L1="Passive Components", Device Class L2=Resistors, Device Class L3="Through-Hole Resistors", Digikey Description="RES 1.18K OHM 1/4W 1% AXIAL", Height=2.6mm, Ipc Land Pattern Name=RESAD1000W75L680D260, Lead Free=Yes, Mouser Description="Metal Film Resistors 1.18K OHM 1/4W 1%", Octopart=https://octopart.com/mfr-25fbf52-1k18-yageo-56251681, RoHS=TRUE, Series=MFR
SW1 SW2 SW3 SW4: library part CMP-00287-39841884-1, "EVQ-PAC07K Switch Tactile N.O. SPST Round Button PC Pins 0.02A 15VDC 1N Thru-Hole Bulk", Color=Black, Contact Current Rating=20mA, Contact Resistance=50mΩ, Max Operating Temperature=70°C, Max Voltage Rating (DC)=15V, Min Operating Temperature=-20°C, Operating Force=1N, Actuator Length=3.1mm, Contact Plating="Gold, Silver", Current Rating=20mA, Depth=7.8mm, Electrical Life=100kcycles, Height=7mm, Illumination Type="Illuminated, Non-Illuminated", Lead Free="Lead Free", Length=6mm, Life (Cycles)=100kcycles, Max Current Rating=20mA, Mechanical Life=100kcycles, Mount="Through Hole", NexarPartId=39841884, Number of Positions=2, Orientation=Straight, Packaging=Bulk, Radiation Hardening=No, REACH SVHC=Unknown, RoHS=Compliant, Switch Function=Off-Mom, Switch Travel=250µm, Termination="PC Pins", Throw Configuration=SPST, Voltage Rating (DC)=15V, Width=6mm
TP1 TP2 TP3 TP4 TP5 TP6 TP7 TP8: library part CMP-1672-00009-1, "Test Point, Orange, 1-Pin THD, RoHS", Forward Current="3 A", Forward Voltage="1.08 V", Max Operating Temperature="150 degC", Max Surge Current="80 A", Min Operating Temperature="-65 degC", Package Quantity=500, Peak Reverse Current="600 uA", ComponentLink1Description="Manufacturer URL", ComponentLink1URL=http://www.keyelco.com/, ComponentLink2Description=Datasheet, ComponentLink2URL=http://keyelco.com/userAssets/file/M65p56.pdf, DatasheetVersion=Jun-15, Diameter="5.3 mm", Height="0.25 inch", Length="9.5 mm", Mount="Through Hole", PackageDescription="1-Pin Through Hole Device, Dia 2.54 mm", PackageReference=5003, Packaging=Bulk, Pins=2, Radiation Hardening=No, REACH SVHC="No SVHC", RoHSCompliant=true, Weight="0.01 lb", Width="0.25 inch"
U1: library part CMP-209535-000001-1, "LDO Voltage Regulators 1A, 3.3V", Dropout Voltage=1.1V, Manufacturer="Advanced Monolithic Systems", Max Junction Temp=+125°C, Max Power Dissipation=1.2W, Max Supply Voltage=15V, Nominal Supply Current=5mA, Output Current=1A, Output Voltage=3.3V, Package=AMS1117, Temperature="-40°C to +125°C", Temperature Range Low=-40°C, Automotive=No, Category=IC, ComponentLink2Description=Datasheet, ComponentLink2URL=http://www.advanced-monolithic.com/pdf/ds1117.pdf, Device Class L1="Integrated Circuits (ICs)", Device Class L2="Power Management ICs", Device Class L3="Voltage Regulators - Linear", Height=1.8mm, Ipc Land Pattern Name=SOT229P700X180-4, Lead Free=Yes, Manufacturer Part Number=AMS1117-3.3, Number Of Outputs=1, Octopart=https://octopart.com/ams1117-3.3-advanced+monolithic+systems-25899300, Output Type=Fixed, RoHS=TRUE, Standoff Height=0.64mm, Temperature Range High=+125°C
U2: library part CMP-00572-88253303-1, "X9C103 Series 100 Tap Non Volatile 10 kOhm Digital Potentiometer - SOIC-8", Case/Package=SOIC, Manufacturer Lifecycle Status=ACTIVE, Max Input Voltage=5.5V, Max Operating Temperature=85°C, Max Supply Current=1mA, Min Input Voltage=4.5V, Min Operating Temperature=-40°C, Operating Supply Voltage=5V, Resistance=10kΩ, Temperature Coefficient=300ppm/°C, Tolerance=20%, ComponentLink1Description="Manufacturer's Website", ComponentLink1URL=http://www.renesas.com, ComponentLink2Description="Datasheet URL", ComponentLink2URL=https://octopart.com/cad-content/api/get-model-datasheet/15189/88253303, ComponentLink3Description="Manufacturer's Package Drawing", ComponentLink3URL=https://www.renesas.com/en/document/psc/m815-8-lead-narrow-body-small-outline-plastic-package, Contact Plating=Tin, Height=0m, HelpURL=https://octopart.com/cad-content/api/get-model-datasheet/15189/88253303, Interface=SPI, Lead Free="Lead Free", Length=4.9mm, Lifecycle Status=Production, Max Supply Voltage=5.5V, Memory Type=Non-Volatile, Min Supply Voltage=4.5V, Mount="Surface Mount", Number of Circuits=1, Number of Pins=8, Number of Positions=100, Number of Taps=100, Operating Supply Current=1mA, Pitch=1.3mm, Radiation Hardening=No, RoHS=Compliant, Taper=Linear, Width=3.9mm
U3: library part CMP-0055-00806-3, "Dual High Speed, Low Power, Low Distortion Voltage Feedback Amplifiers, 8-pin Narrow SOIC, Pb-Free", Manufacturer="Texas Instruments", Package Reference=D0008A, PackageTopMarking=NSZXTT*LM61*72IM, PowerWise=Y, Code_IPC=SOIC127P600-8, Code_JEDEC=MS-012-AA, ComponentLink1Description="Datasheet URL", ComponentLink1URL=http://www.ti.com/general/docs/lit/getliterature.tsp?genericPartNumber=LM6172&fileType=pdf, CompType=Amplifiers, PackageDescription="SOIC Narrow, 4.9 x 3.9 x 1.45mm, 8 Lead, 1.27mm Pitch", PinCount=8, RoHS=Y
U4: library part CMP-1685-00009-2, "IC OPAMP GP 2 CIRCUIT 8SOIC", Case/Package=SOIC, Dual Supply Voltage=9V, Input Bias Current=250nA, Input Offset Voltage (Vos)=7mV, Max Dual Supply Voltage=16V, Max Operating Temperature=70°C, Max Supply Voltage=32V, Min Dual Supply Voltage=1.5V, Min Operating Temperature=0°C, Min Supply Voltage=3V, Nominal Supply Current=1.2mA, Operating Supply Current=1mA, Output Current=30mA, Package Quantity=2500, Power Supply Rejection Ratio (PSRR)=65dB, Voltage Gain=100dB, Bandwidth=700kHz, Common Mode Rejection Ratio=65dB, Contact Plating=Gold, Gain Bandwidth Product=700kHz, Height=1.58mm, Lead Free="Lead Free", Length=4.9mm, Mount="Surface Mount", Number of Amplifiers=2, Number of Channels=2, Number of Circuits=2, Number of Elements=2, Number of Pins=8, Operating Supply Voltage=16V, Output Current per Channel=30mA, Packaging="Tape and Reel", Radiation Hardening=No, REACH SVHC="No SVHC", Slew Rate=0.3V/µs, Unity Gain Bandwidth Product=700kHz, Width=3.91mm
U5: library part CMP-1310-00289-1, "Single Supply Dual Operational Amplifier, 3 to 32 V, 0 to 70 degC, 8-Pin SOIC, Pb-Free, Tape and Reel", Manufacturer="On Semiconductor", PartNumber=LM358ADR2G, ComponentLink1Description="Manufacturer URL", ComponentLink1URL=http://www.onsemi.com/, ComponentLink2Description=Datasheet, ComponentLink2URL=http://www.onsemi.cn/pub_link/Collateral/LM358-D.PDF, ComponentLink3Description="Package Specification", ComponentLink3URL=http://www.onsemi.com/pub_link/Collateral/751-07.PDF, DatasheetVersion="Rev. 27", Mounting Technology="Surface Mount", PackageDescription="8-Pin Small Outline Integrated Circuit, Body 4.9 x 3.9 mm, Pitch 1.27 mm", PackageReference=SOIC-8-751-07, PackageVersion="Rev. AK, 02/2011", Packing="Tape and Reel", RoHS=TRUE, VCC Max (V)=32, VCC Min (V)=3
U6: "Raspberry Pi Board, Arm Cortex-M0+; Core Architecture:Arm; Core Sub-Architecture:Cortex-M0+; Kit Contents:Raspberry Pi Pico Board; No. Of Bits:32Bit; Silicon Core Number:Rp2040; Silicon Manufacturer:Raspberry Pi", Package=None, Check_prices=https://www.snapeda.com/parts/RASPBERRY%20PI%20PICO/Raspberry+Pi/view-part/?ref=eda, MF="Raspberry Pi", MP="RASPBERRY PI PICO", SnapEDA_Link=https://www.snapeda.com/parts/RASPBERRY%20PI%20PICO/Raspberry+Pi/view-part/?ref=snap

## Free pads (board coordinates)
  round 4 hole 3.2: 2(4,96) 2(4,4) 2(96,4) 2(96,96)

## Via types
v1: diameter 0.7, hole 0.3, Top Layer to Bottom Layer, 59 vias

## Nets (pads, with @x,y where several pads share a name; then routed paths per layer and width w, separated by ;. In a path a pad name is that pad's centre, name@x,y a point inside that pad or via, vN(x,y) a via of type N, cw(c..) or ccw(c..) an arc to the next point about the centre after c; other vN are vias at no path point)
+3.3V: R28.2 R29.2 R31.2 R32.2 R33.2 U1.2 U6.3V3_EN | length 179.3
  Top Layer w0.5: R31.2 R28.2 13.75,22 12.25,20.5 4.423,20.5 3.249,19.326 3.249,11.147 3.96,10.436 9.319,10.436 16.825,17.941 16.825,18.564 ; R29.2 16.825,18.564 ; U6.3V3_EN 41.73,84.11 42.619,83.221 42.619,44.929 ; U1.2 76,19.503 73.48,22.024 73.48,27.377 69.898,30.959 56.589,30.959 42.619,44.929 ; 16.825,18.564 26.185,18.564 26.825,19.204 R32.2 26.825,20.977 R33.2 26.825,22.78 32.103,22.78 41.654,32.33 41.654,43.964 42.619,44.929
+5: C1.2 C2.2 J1.1 LS1.2 P2.1 U1.3 U2.8 | length 149.7
  Top Layer w0.5: C2.2 C1.2 66.75,13.25 68,12 68,10.25 ; J1.1 68,10.25 ; U1.3@78.29,17.7 81.024,17.7 81.76,18.437 81.76,48.739 80.75,49.749 80.75,56.796 82.109,58.155 U2.8 ; U1.3 78.25,17.665 78.25,14.293 74.207,10.25 68,10.25
  Bottom Layer w0.5: P2.1 6.58,32.08 8.989,34.489 47.181,34.489 50,31.67 LS1.2 50.75,25.25 C2.2
+15: C3.2 C4.2 C8.2 C9.1 C15.1 D1.1 J2.1 Q1.1 U3.8 U4.8 U5.8 | length 147.2
  Top Layer w0.5: C15.1 64.944,58.609 U5.8 65.961,58.155 73,65.194 ; U4.8 67.144,87.155 v1(67.155,87.144) ; v1(73.306,79.346) C9.1 v1@73.306,77.335 ; v1(73.48,77.161) v1@73.306,77.335 ; v1(77.874,28.343) 77.874,35.384 76,37.258 D1.1 76,41.556 79.703,45.259 79.703,48.79 73.25,55.242 73.25,60.612 73,60.862 73,65.194 ; J2.1 85.75,13.45 C3.2 C4.2 ; U3.8 v1(84.351,87.155) ; 73,65.194 73.734,65.927 73.734,74.33 C8.2 73.75,76.044 73.306,76.488 v1@73.306,77.335
  Bottom Layer w0.5: v1(67.155,87.144) 63.5,83.488 63.5,81.043 63.893,80.65 72.002,80.65 v1(73.306,79.346) ; Q1.1 73.48,38.6 74.13,39.25 D1.1 ; v1(73.48,77.161) 83.233,77.161 84.351,78.279 v1(84.351,87.155) ; v1(77.874,28.343) 80.973,25.244 85.75,25.244 C4.2
-15: C5.1 C6.1 C13.1 C16.1 C17.1 D2.2 J2.3 Q5.1 U3.4 U4.4 U5.4 | length 169.7
  Top Layer w0.5: C17.1 55.694,58 54.218,58 53.925,57.707 53.925,55.335 55.26,54 56.707,54 57.052,54.345 U5.4 58.909,54.295 58.909,53.372 57.033,50.517 ccw(c57.45,50.242) 57.031,50.515 56.95,50.391 56.95,44.573 ; U4.4 61.643,83.345 63.238,81.75 v1(64.75,81.75) ; Q5.1 58.1,33.4 56.95,34.55 56.95,44.573 ; v1(72,60.25) 72,59.15 72.25,58.9 72.25,54.828 72.438,54.64 72.438,52.32 64.691,44.573 56.95,44.573 ; v1(73.5,81.75) 75,81.75 76.545,83.295 76.975,83.295 U3.4 77.944,83.345 79.944,81.345 C13.1 79.944,76.514 79.55,76.12 C16.1 79.525,74.305 79.525,73.025 v1(79.5,73) ; J2.3 94.75,12.45 C5.1 C6.1
  Bottom Layer w0.5: Q5.1 65.657,33.4 66.307,32.75 D2.2 69.675,32.75 81.5,20.926 94.064,20.926 94.75,20.24 C5.1 ; v1(64.75,81.75) v1(73.5,81.75) ; v1(72,60.25) 72,66.563 78.4,72.963 79.463,72.963 v1(79.5,73)
ATRAS: R33.1 SW4.B U6.GP6 | length 92.7
  Top Layer w0.5: U6.GP6 23.01,71.41 25.982,68.438 25.982,34.083 25,33.101 25,30.586 25,26.895 25.175,26.72 25.175,22.811 ; R33.1 25.175,22.811 ; v1(25.956,23.593) 25.175,22.811
  Bottom Layer w0.5: v1(25.956,23.593) 46.832,23.593 SW4.B
AVANCE: R32.1 SW3.B U6.GP7 | length 78.3
  Top Layer w0.5: U6.GP7 23.01,68.87 24.97,66.91 24.97,39.325 24,38.355 24,32.025 ; 24,32.025 24,30.4 23.6,30 21.5,30 20.5,29 20.5,24 v1(24,20.5) 24.054,20.5 24.129,20.425 25,20.425 25.175,20.25 R32.1
  Bottom Layer w0.5: v1(24,20.5) 27.669,20.5 27.74,20.57 31.355,20.57 SW3.B
CS: U2.7 U6.GP2 | length 97
  Top Layer w0.5: U6.GP2 23.786,84.11 v1(35.939,96.262) ; v1(77.722,78.863) 77.722,74.314 78.09,73.946 78.09,71.789 82.979,66.9 82.979,60.245 83.767,59.458 85.2,59.458 85.2,56.885 U2.7
  Bottom Layer w0.5: v1(35.939,96.262) 60.738,96.262 77.722,79.278 v1(77.722,78.863)
GND: C1.1 C2.1 C3.1 C4.1 C5.2 C6.2 C8.1 C9.2 C10.1 C12.1 C13.2 C15.2 C16.2 C17.2 C19.2 C20.2 C21.2 J1.2 J2.2 J3.2 P2.4 P3.2 Q6.2 R5.1 R10.1 R48.1 R50.1 SW2.A' SW3.A U1.1 U2.4 U2.6 U3.3 U3.5 U5.5 U6.GND7 | length 105.9
  Top Layer w0.5: v1(55.75,55.25) C17.2 ; v1(75.25,85.25) 75.835,84.665 76.975,84.665 U3.3
  Bottom Layer w0.5: SW3.A 34.5,9.043 34.207,8.75 32.25,8.75 31.5,8 31.5,4.043 31.793,3.75 72.707,3.75 73,4.043 J1.2 ; v1(53.5,37.75) 53.5,36.25 60.707,29.043 68.457,29.043 68.75,28.75 C2.1 ; v1(55.623,52.623) 55.623,52.677 55.75,52.804 v1(55.75,55.25) ; C6.2 92.75,26.75 96,30 96,32.707 95.707,33 94.755,33 91.207,36.548 91.207,40.207 92.45,41.45 94.4,41.45 J3.2
  other v1: 29,28.5 38.5,31.75 70,60.25 64.75,63 74.5,63.25 88.123,71 70,78.25 82.873,78.5 45.5,80 50.25,81.75 82.5,82.25
GPIO8: R49.1 U6.GP8 | length 55.8
  Bottom Layer w0.5: R49.1 9.561,86.75 7.491,88.82 7.491,91.69 9.8,94 22.957,94 23.25,93.707 23.25,67 22.58,66.33 U6.GP8
GPIO9: R41.1 U6.GP9 | length 24.9
  Top Layer w0.5: R41.1 17.457,80.75 17.75,80.457 17.75,77.605 17.283,77.138 17.283,76.293 v1(17.245,76.255)
  Bottom Layer w0.5: v1(17.245,76.255) 17.245,75.15 17,74.905 17,64.502 17.712,63.79 U6.GP9
GPIO10: R42.1 U6.GP10 | length 76.6
  Top Layer w0.5: v1(11.402,36.318) 10.716,37.004 10.716,73.716 11.75,74.75 R42.1 ; U6.GP10 22.985,58.71 23.908,57.786 23.908,41.559 21.029,38.68 21.029,37.568 21.113,37.484 v1(21.113,36.318)
  Bottom Layer w0.5: v1(11.402,36.318) v1(21.113,36.318)
GPIO11: R43.1 U6.GP11 | length 17.8
  Bottom Layer w0.5: R43.1 14.97,68.75 15.263,68.457 15.263,64.055 18.5,60.818 18.5,56.463 18.793,56.17 U6.GP11
GPIO12: R44.1 U6.GP12 | length 14.8
  Bottom Layer w0.5: R44.1 15,62.75 16.762,60.988 16.762,54.988 18.12,53.63 U6.GP12
GPIO13: R45.1 U6.GP13 | length 12.4
  Bottom Layer w0.5: R45.1 15.457,56.75 15.75,56.457 15.75,52 16.509,51.241 20.819,51.241 U6.GP13
GPIO14: R46.1 U6.GP14 | length 9.4
  Bottom Layer w0.5: R46.1 15,50.75 19.5,46.25 20.73,46.25 U6.GP14
GPIO15: R47.1 U6.GP15 | length 8
  Bottom Layer w0.5: R47.1 18.25,44.75 19.53,43.47 U6.GP15
INC: U2.1 U6.GP27_A1 | length 56.7
  Top Layer w0.5: v1(76.99,73.49) 76.99,72.221 76.75,71.981 76.75,70.767 79.271,68.246 79.271,58.155 U2.1
  Bottom Layer w0.5: U6.GP27_A1 40.189,71.41 41.25,72.471 41.25,72.5 42.15,73.4 68.62,73.4 68.71,73.49 v1(76.99,73.49)
MULT/START: R31.1 SW2.B U6.GP3 | length 90.5
  Top Layer w0.5: v1(15.25,25.525) 15.275,25.5 17,25.5 ; R31.1 16.825,25.325 16.947,25.447 17.97,26.47 17.97,75.425 18.75,76.205 18.75,81.156 19.164,81.57 U6.GP3
  Bottom Layer w0.5: v1(15.25,25.525) 13.993,26.782 13.993,28.749 14.755,29.511 17.498,29.511 22.9,24.109 22.9,17.914 23,17.814 SW2.B
NetC10_2: C10.2 R6.2 U4.3 | length 32.2
  Top Layer w0.5: R6.2 48.575,70.303 49.045,70.303 49.756,71.015 49.756,80.244 47.25,82.75 47.25,85.334 47.793,85.877 48.877,85.877 C10.2 51,86 52.25,87.25 57.207,87.25 57.5,86.957 57.5,85.851 58.736,84.615 U4.3
NetC11_1: C11.1 R3.2 R7.3 R12.2 R15.2 R16.2 U3.6 | length 83
  Top Layer w0.5: C11.1 61.556,96.707 61.849,97 74.537,97 74.83,96.707 74.83,93.185 75.715,92.3 77.595,92.3 79.83,90.065 79.83,85.479 80.693,84.615 U3.6 83.97,84.615 84.834,83.751 84.834,80.133 v1(85.621,79.346) ; R16.2 R15.2 R12.2 ; v1(67.75,75.5) 65.425,77.825 64.75,77.825 64.575,78 64.575,79.457 64.868,79.75 67.051,79.75 70.575,83.274 R3.2
  Bottom Layer w0.5: v1(67.75,75.5) 76.03,75.5 76.12,75.59 84.583,75.59 85.621,76.628 v1(85.621,79.346)
NetC11_2: C11.2 P1.2 R7.1 R7.2 TP5.1 | length 38.4
  Top Layer w0.5: C11.2 59.944,94.101 60.237,93.808 62.669,93.808 63.111,94.25 R7.1 ; P1.2 85.29,91.966 87.75,89.506 TP5.1
  Bottom Layer w0.5: R7.1 R7.2 72.29,92.543 72.583,92.25 84.75,92.25 85.138,92.638 85.138,94.098 P1.2
NetC12_2: C12.2 R9.2 U5.3 | length 23.2
  Top Layer w0.5: R9.2 45.75,62.957 46.043,63.25 C12.2 50.46,63.25 54.227,59.483 57.249,59.483 57.249,56.525 58.109,55.665 58.96,55.665 U5.3
NetC14_1: C14.1 R14.3 R17.2 U5.6 | length 39.4
  Top Layer w0.5: v1(51.75,50) 51.75,50.054 51,50.804 51,57.782 51.293,58.075 R17.2 ; R14.3 64.08,48.739 62.964,49.855 62.964,55.615 U5.6 66.927,55.615 67.292,55.25 C14.1
  Bottom Layer w0.5: v1(51.75,50) 53.862,50 54.339,49.523 61.707,49.523 64.08,47.15 R14.3
NetC14_2: C14.2 R14.1 R14.2 R18.1 TP6.1 U5.7 | length 40.1
  Top Layer w0.5: R18.1 54.925,67.075 TP6.1 60.75,59.61 63.475,56.885 ; R14.1 R14.2 61.54,56.441 61.838,56.739 61.984,56.885 63.475,56.885 ; C14.2 67.292,57.25 66.927,56.885 U5.7 63.475,56.885
  Bottom Layer w0.5: R14.1 R14.2
NetC18_1: C18.1 C24.1 P1.3 Q2.3 R22.1 R24.2 R25.2 TP8.1 | length 116.9
  Top Layer w0.5: P1.3 87.83,91.666 90.625,88.871 90.625,82.465 91.59,81.5 C24.1 93.2,78.264 92.25,77.314 Q2.3 ; R24.2 92.25,44.75 TP8.1 96.25,47.75 97.806,49.306 C18.1
  Bottom Layer w0.5: R22.1 R24.2 ; P1.3 88.04,94.04 88.04,93.21 96.75,84.5 96.75,60.556 98.6,58.706 98.6,57.794 97.622,56.816 94.316,56.816 ; R25.2 92.318,68.682 92.318,67.932 94.638,65.612 94.638,57.138 94.316,56.816 ; TP8.1 92,48 92,56.523 92.293,56.816 94.316,56.816
NetC18_2: C18.2 C24.2 Q2.2 Q3.3 R23.2 | length 64.8
  Top Layer w0.5: Q2.2 93.2,71.975 93.25,72.025 93.325,72.025 95.337,74.037 96.75,74.037 96.787,74 97.825,74 98.753,73.072 98.753,61.693 96.35,59.29 96.35,58.55 96.337,58.537 96.337,58.155 95.682,57.5 95.253,57.5 94.792,57.039 94.792,54.961 95.074,54.68 95.074,53.771 94.75,53.447 94.75,52.75 v1(96.5,51) ; 94.79,53 C18.2 ; Q3.3@96.75,74.1 96.75,81.45 C24.2
  Bottom Layer w0.5: R23.2 80,42.5 81.5,44 93.1,44 96.5,47.4 v1(96.5,51)
NetC19_1: C19.1 R25.1 | length 15.5
  Top Layer w0.5: v1(97.5,58.25) 97.5,58.196 97.806,57.89 C19.1
  Bottom Layer w0.5: R25.1 94,68.875 94.35,68.525 94.475,68.525 95,68 95.457,68 95.75,67.707 95.75,59 96.462,58.288 97.462,58.288 v1(97.5,58.25)
NetC20_1: C20.1 Q6.1 R30.2 | length 18.1
  Top Layer w0.5: Q6.1 26.05,27.86 26.812,27.098 33.221,27.098 34.999,28.876 34.999,31.957 ; R30.2 33.775,32.075 34.881,32.075 34.999,31.957 ; C20.1 36.291,32.022 35.063,32.022 34.999,31.957
NetC21_1: C21.1 SW2.B' | length 4.8
  Top Layer w0.5: C21.1 20.556,5.806 21.175,6.425 SW2.B'
NetC22_1: C22.1 SW4.B' | length 5.3
  Top Layer w0.5: C22.1 56.556,6.056 57.175,6.675 SW4.B'
NetC22_2: C22.2 SW4.A' | length 4.8
  Top Layer w0.5: SW4.A' 54.325,6.675 54.944,6.056 C22.2
NetC23_1: C23.1 SW3.B' | length 5
  Top Layer w0.5: C23.1 38.556,6.132 38.849,6.425 SW3.B'
NetC23_2: C23.2 SW3.A' SW4.A | length 25.2
  Top Layer w0.5: SW3.A' 36.651,6.425 36.944,6.132 C23.2
  Bottom Layer w0.5: SW3.A' 37.234,9.159 50.734,9.159 SW4.A
NetD1_2: D1.2 Q1.3 R22.2 | length 15.2
  Bottom Layer w0.5: Q1.3 73.48,33.4 74.13,32.75 D1.2 82.75,32.75 84,31.5 R22.2
NetD2_1: D2.1 Q5.3 R24.1 | length 34.5
  Bottom Layer w0.5: Q5.3 65.657,38.6 66.307,39.25 D2.1 68,40.707 68.293,41 77.207,41 77.5,40.707 77.5,36 79.25,34.25 85.25,34.25 88,31.5 R24.1
NetJ3_1: J3.1 Q3.2 R23.1 TP7.1 | length 66.5
  Top Layer w0.5: TP7.1 92.25,34.3 J3.1 ; v1(93.974,54.226) 93.974,54.28 93.65,54.604 93.65,58.107 94.068,58.525 94.911,58.525 95.35,58.964 95.35,60.5 97.7,62.85 Q3.2
  Bottom Layer w0.5: R23.1 80,28.452 80.795,27.657 91.157,27.657 92.25,28.75 TP7.1 ; v1(93.974,54.226) 95.502,54.226 95.776,54.5 97.25,54.5 98.75,53 98.75,40.8 J3.1
NetLS1_1: LS1.1 Q6.3 | length 21.7
  Top Layer w0.5: Q6.3 27,32.381 v1(28.395,32.381)
  Bottom Layer w0.5: v1(28.395,32.381) 28.395,31.162 33.557,26 LS1.1
NetP1_1: P1.1 R27.1 U3.7 | length 45.3
  Top Layer w0.5: U3.7 80.998,85.885 80.998,87.88 82.75,89.632 82.75,92.809 ; P1.1 82.75,92.809 ; R27.1@92,62.825 R27.1 92.175,63.42 90.799,63.42 89.228,64.991 89.228,79.549 85.926,82.851 85.926,89.633 82.75,92.809
NetP3_1: P3.1 R29.1 U6.GP4 | length 95.8